# Altium PCB PCB3.PcbDoc
Units mm, origin at the board's own origin, x right, y up, seen from the top; angles counter-clockwise.
Board outline 40.08 x 40.08 mm, 2 copper layers (Top Layer, Bottom Layer); 33 components, 27 nets, 198 pads, 24 vias.
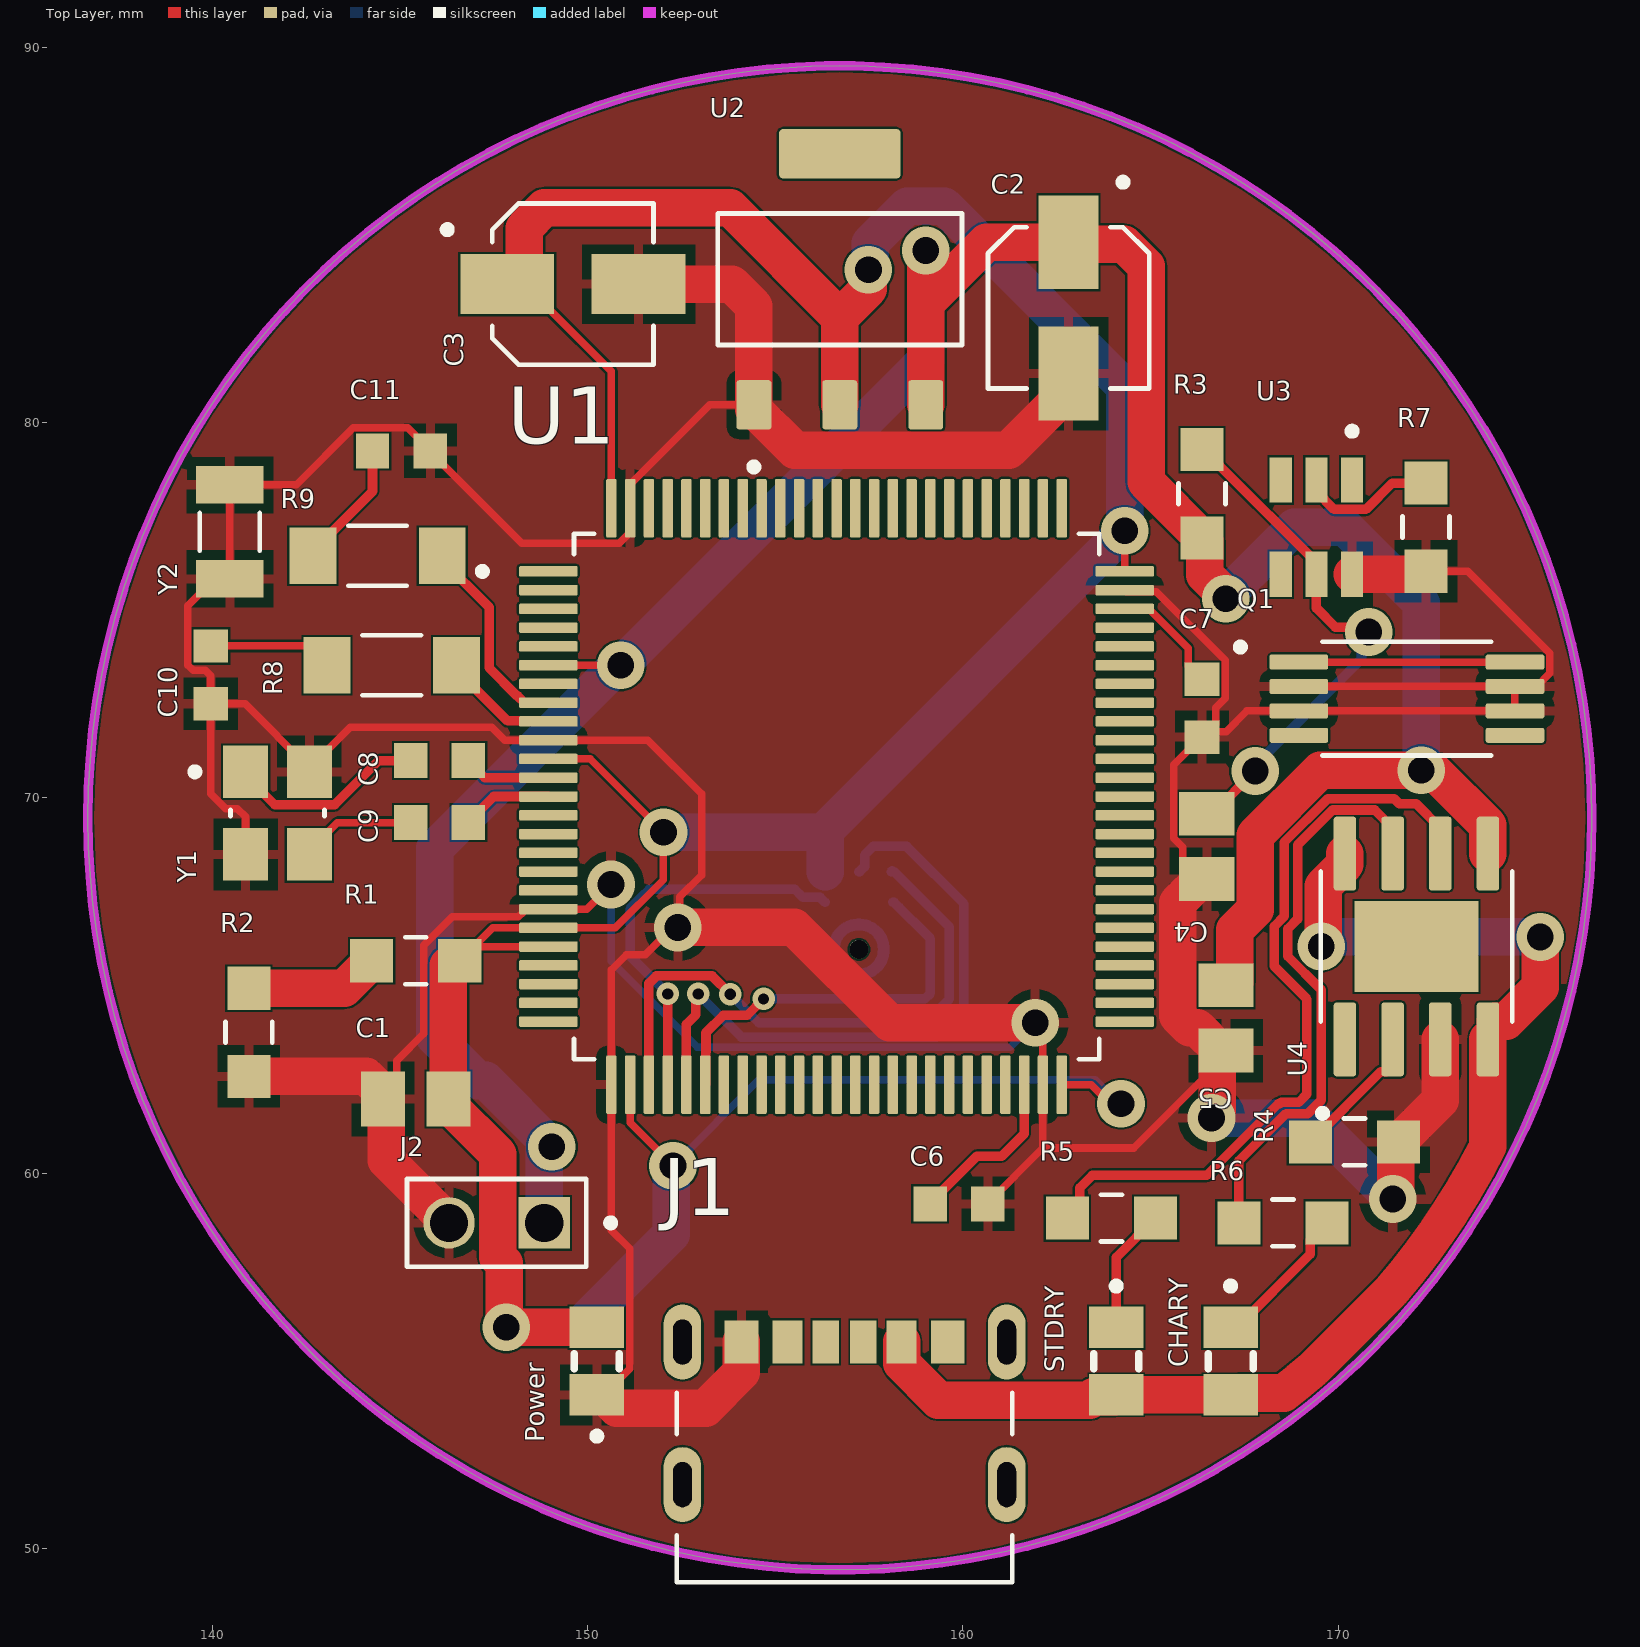
[diagram p0: Top Layer view]
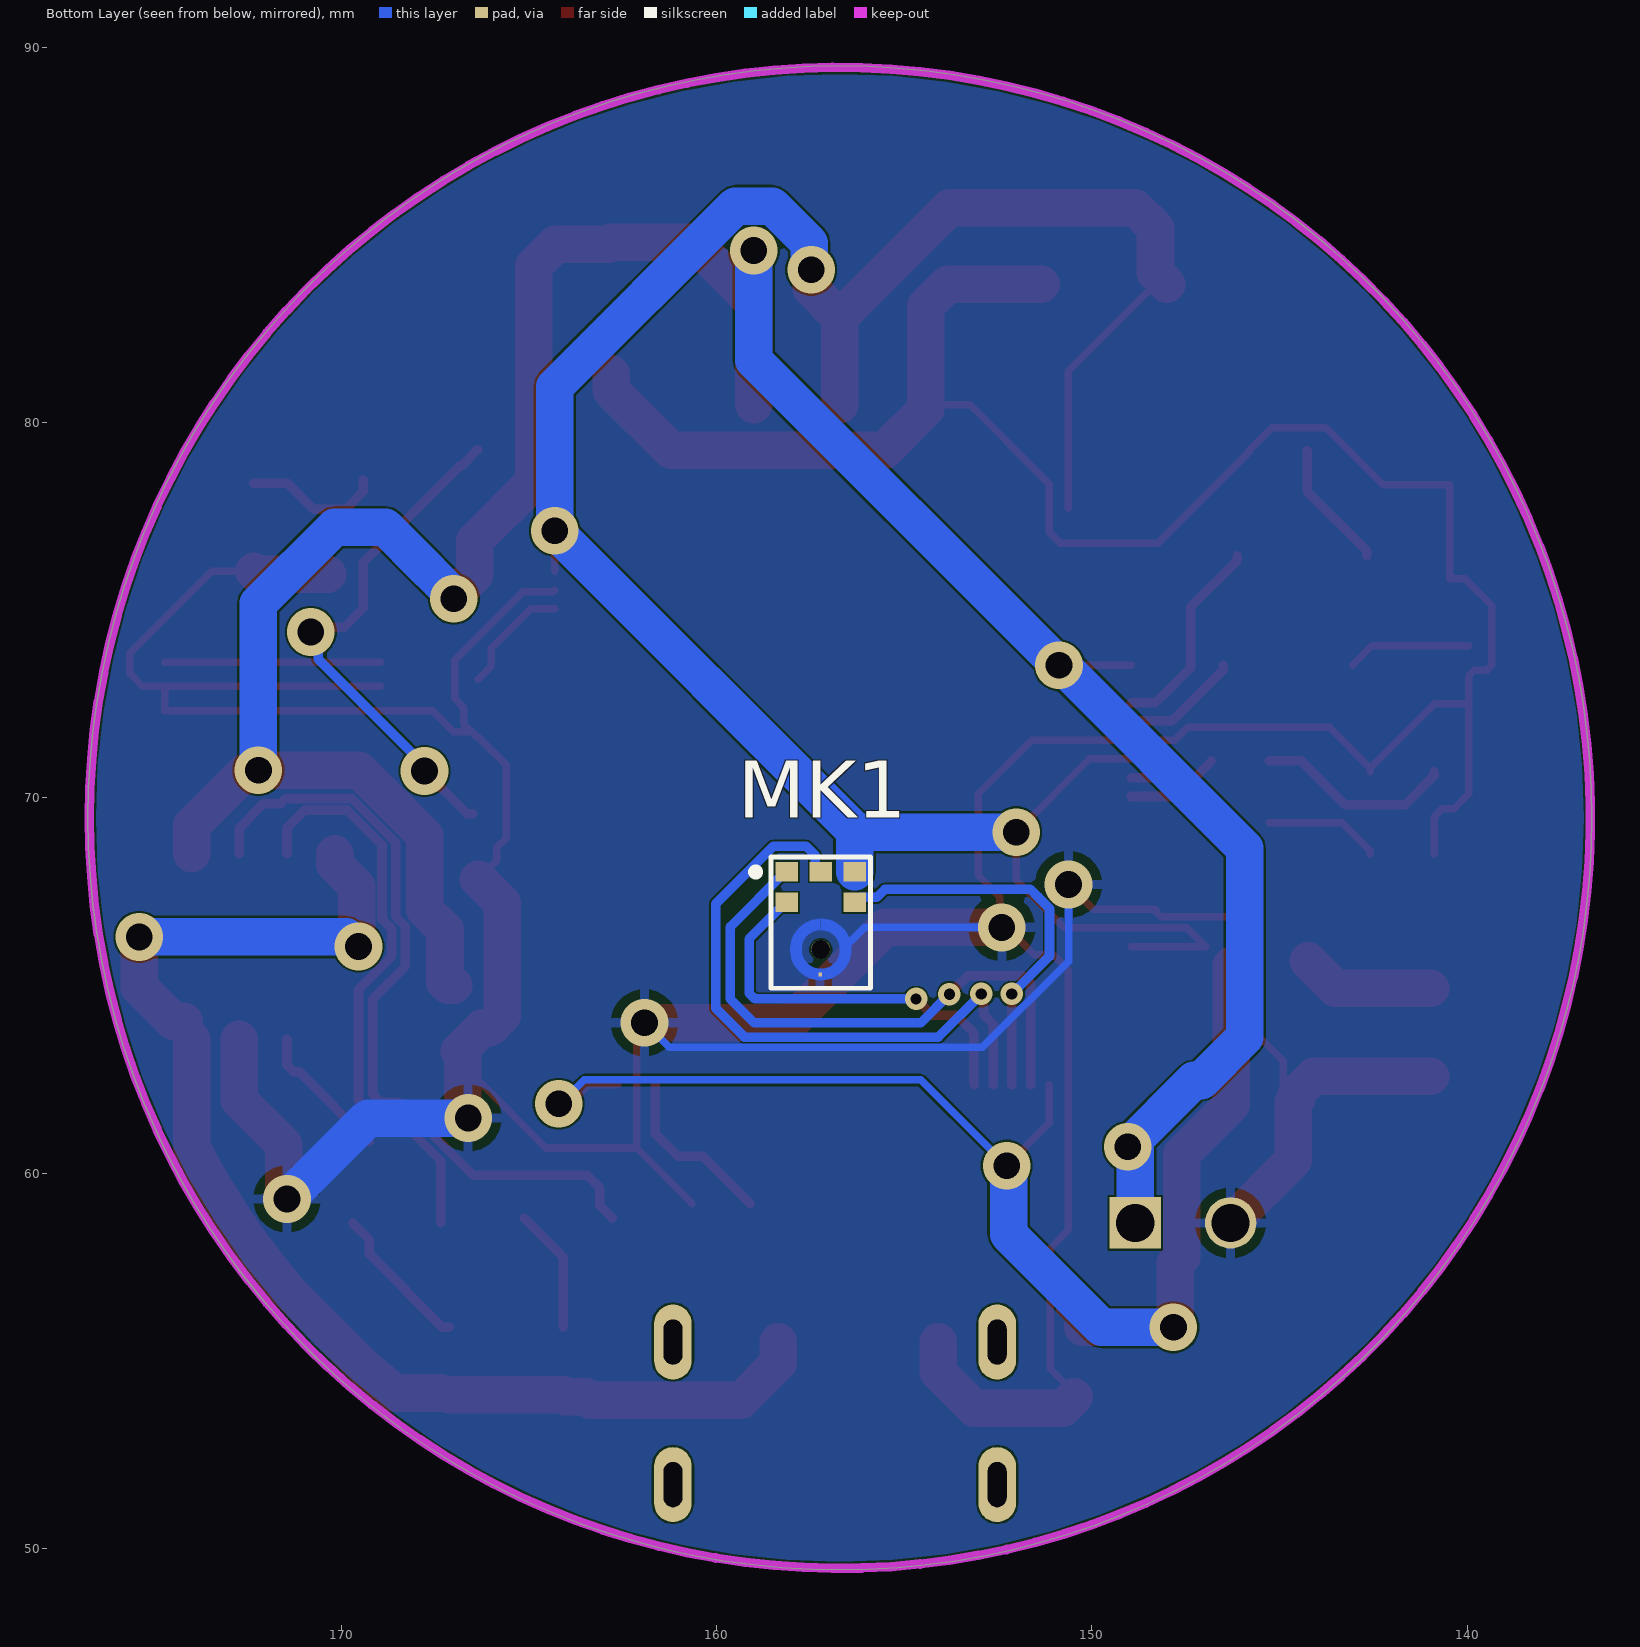
[diagram p1: Bottom Layer view, seen from below]
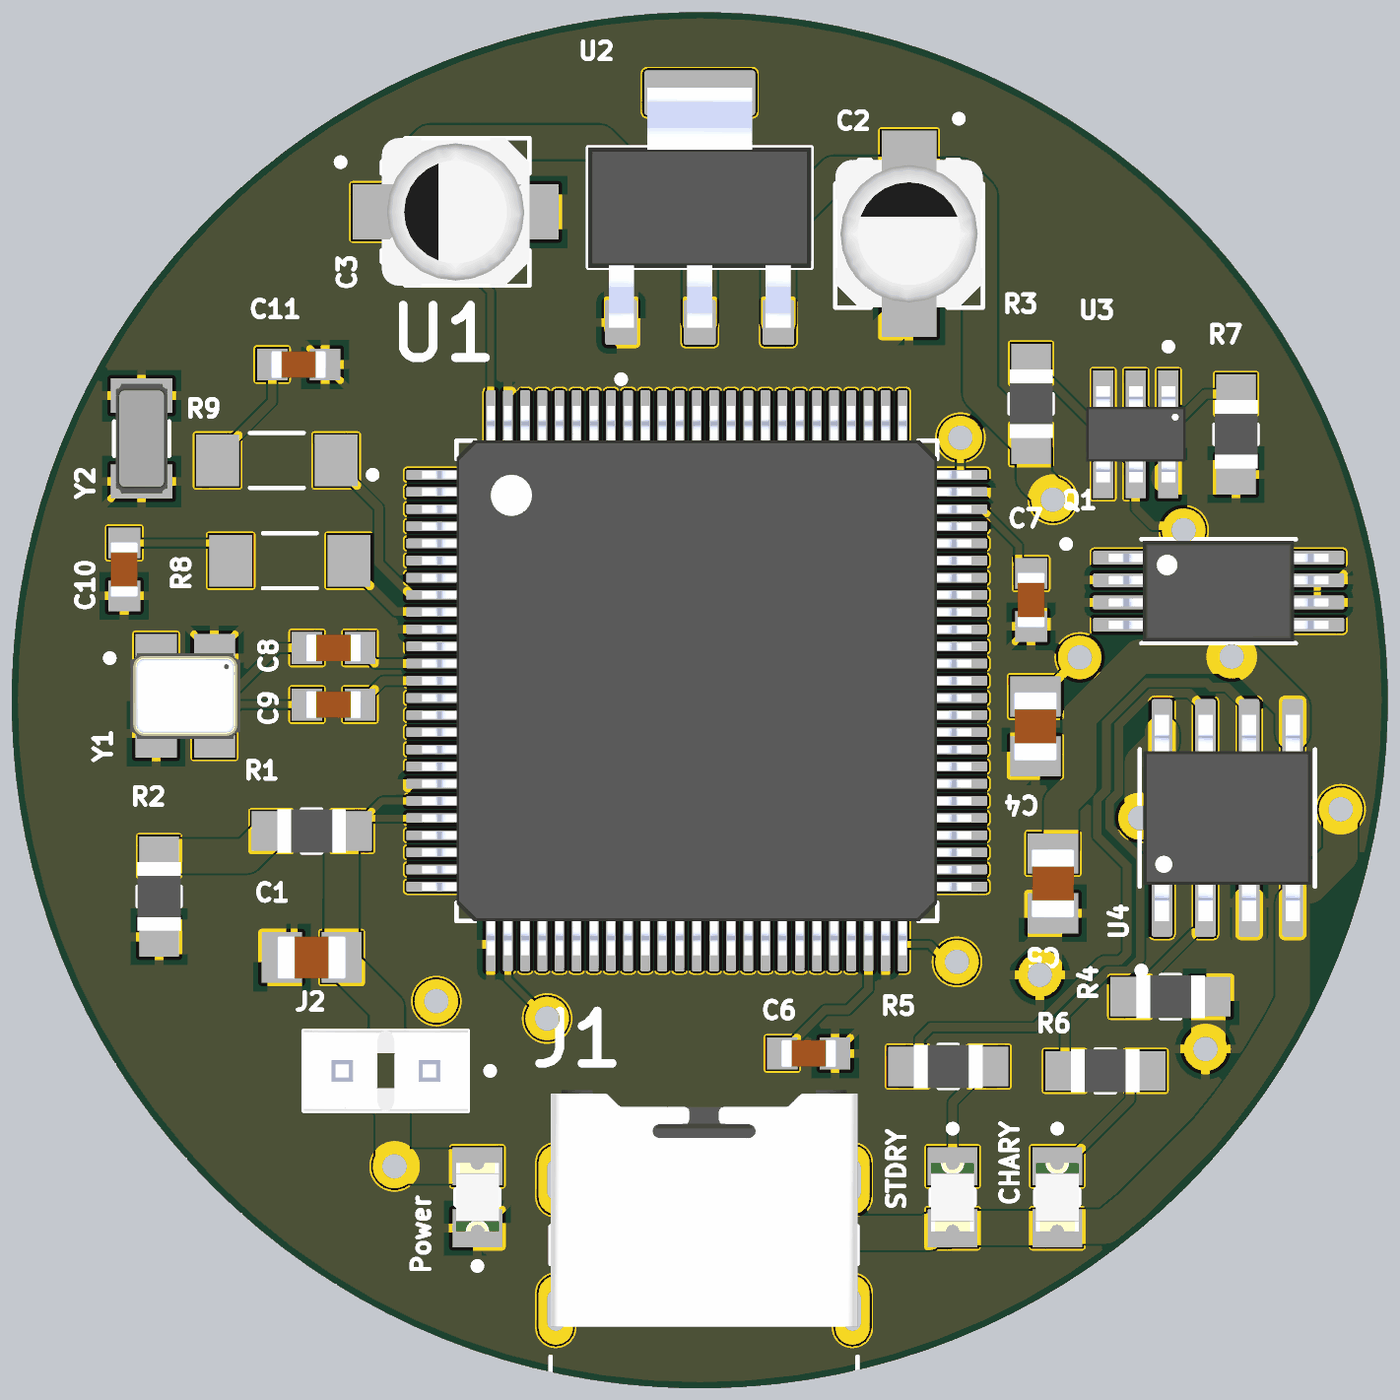
[diagram p2: 3D render of the assembled board from above, using the file's embedded part models]

## Layer stack, top to bottom
Top Solder: solder mask 0.0102, Solder Resist, Dk 3.5
Top Layer: signal copper 0.0356
Dielectric 1: dielectric 0.32, FR-4, Dk 4.8
Bottom Layer: signal copper 0.0356
Bottom Solder: solder mask 0.0102, Solder Resist, Dk 3.5

## Board outline
136.677,69.469 ccw(c156.718,69.469) 156.718,49.428 ccw(c156.718,69.469) 176.759,69.469 ccw(c156.718,69.469) 156.718,89.51 ccw(c156.718,69.469)

## Design rules (kind name [scope] priority, off if disabled: settings)
Clearance [All] p1: gap=0.051 ignorepadtopadclearanceinfootprint=TRUE
PolygonConnect [All] p1: connectstyle=Relief reliefconductorwidth=0.254 reliefentries=4 polygonreliefangle="90 Angle" airgapwidth=0.254
RoutingVias WS [InNet('WS')] p1: holewidth=0.6 width=1.2 viastyle="Through Hole" minholewidth=0.2 minwidth=0.5 maxholewidth=0.3 maxwidth=0.6
RoutingVias LR [InNet('LR')] p2: holewidth=0.6 width=1.2 viastyle="Through Hole" minholewidth=0.2 minwidth=0.5 maxholewidth=0.3 maxwidth=0.6
RoutingVias SDI [InNet('SDI')] p3: holewidth=0.6 width=1.2 viastyle="Through Hole" minholewidth=0.2 minwidth=0.5 maxholewidth=0.3 maxwidth=0.6
RoutingVias SCK [InNet('SCK')] p4: holewidth=0.6 width=1.2 viastyle="Through Hole" minholewidth=0.2 minwidth=0.5 maxholewidth=0.3 maxwidth=0.6
RoutingVias [All] p5: holewidth=0.711 width=1.27 viastyle="Through Hole" minholewidth=0.711 minwidth=1.27 maxholewidth=0.711 maxwidth=1.27
SolderMaskExpansion [All] p1: expansion=0.102 istentingtop=FALSE
SupplyNets "Schematic Supply Nets_3" [InNet('+3.3V')] p1: voltage=0.000
SupplyNets "Schematic Supply Nets_2" [InNet('VBUS')] p2: voltage=0.000
SupplyNets "Schematic Supply Nets_1" [InNet('GND')] p3: voltage=0.000
SupplyNets "Schematic Supply Nets" [InNet('BAT+')] p4: voltage=0.000
Width GND [InNet('GND')] p1: maxlimit=2 minlimit=0.2 preferedwidth=1
Width INPUT [InNet('INPUT')] p2: maxlimit=2 minlimit=0.2 preferedwidth=1
Width VBUS [InNet('VBUS')] p3: maxlimit=2 minlimit=0.2 preferedwidth=1
Width 3.3 [InNet('+3.3V')] p4: maxlimit=2 minlimit=0.2 preferedwidth=1
Width BAT [InNet('BAT+')] p5: maxlimit=2 minlimit=0.2 preferedwidth=1
Width [All] p6: maxlimit=0.3 minlimit=0.2 preferedwidth=0.254
30 further rules are at their usual default settings.

## Components (designator, comment, footprint, x,y, rotation, side; value= is the part's Value field where it differs from the comment)
C1 "104" CAPC2012X145N 145.415,61.976 r0 top
C2 "1μF 50V" CAP_EEEHP1H1R0R 162.814,83.058 r270 top
C3 "1μF 50V" CAP_EEEHP1H1R0R 149.606,83.693 r0 top
C4 "104" CAPC2012X145N 166.497,68.707 r90 top
C5 "106" CAPC2012X145N 167.005,64.135 r90 top
C6 "2.2uF" CAPC1608X90N 159.893,59.182 r180 top
C7 "2.2uF" CAPC1608X90N 166.37,72.39 r90 top
C8 "12.5pF" CAPC1608X90N 146.05,70.993 r0 top
C9 "12.5pF" CAPC1608X90N 146.05,69.342 r180 top
C10 "12.5pF" CAPC1608X90N 139.954,73.279 r90 top
C11 "12.5pF" CAPC1608X90N 145.034,79.248 r180 top
CHARY "597-5411-407F" LEDC2012X70N 167.132,54.991 r270 top (schematic designator D3)
J1 "UJC-HP-3-SMT-TR" CUI_UJC-HP-3-SMT-TR 156.845,55.499 r0 top
J2 "3-644456-2" TE_3-644456-2 148.844,58.674 r180 top
MK1 "ICS-43434" MIC_ICS-43434 157.226,66.675 r180 bottom
Power "597-5411-407F" LEDC2012X70N 150.241,54.991 r90 top (schematic designator D1)
Q1 "FS8205A" SOP65P640X120-8N 171.831,72.644 r0 top
R1 "1K" RES_ERJU06J203V 145.415,65.659 r0 top
R2 "1K" RES_ERJU06J203V 140.97,63.754 r270 top
R3 "1K" RES_ERJU06J203V 166.37,78.105 r270 top
R4 "1K" RES_ERJU06J203V 170.434,60.833 r180 top
R5 "1K" RES_ERJU06J203V 163.957,58.801 r0 top
R6 "1K" RES_ERJU06J203V 168.529,58.674 r0 top
R7 "1K" RES_ERJU06J203V 172.339,77.216 r270 top
R8 "0 0.1%" RES_ERJU08F2201V 144.78,73.533 r180 top
R9 "0 0.1%" RES_ERJU08F2201V 144.399,76.454 r180 top
STDRY "597-5411-407F" LEDC2012X70N 164.084,54.991 r270 top (schematic designator D2)
U1 "STM32H743VIT6" QFP50P1600X1600X160-100N 156.631,70.037 r0 top
U2 "AMS1117-3.3" SOT229P700X180-4N 156.718,83.82 r90 top
U3 "DW01A" SOT95P280X145-6N 169.418,77.216 r270 top
U4 "TP4056" SOP127P600X175-9N 172.085,66.04 r90 top
Y1 "24MHz" XTAL_C3E-24.000-12-3030-R 141.732,69.596 r0 top
Y2 "32.7680K" XTAL_FC-135_32.7680KA-A0 140.462,77.089 r90 top

## Footprints (in the part's own frame and the unit in brackets; to place one, negate y for a bottom-side part, rotate by r counter-clockwise, add the part's x,y. Pads: shape width x height; smd on the part's side, far side on the other; paste and mask are expansions set on the pad)
CAP_EEEHP1H1R0R [mm]
  rect 2.5x1.6 smd: 1(-1.75,0) 2(1.75,0)
  silkscreen extent -3.45,-2.15 2.15,2.15, body extent -2.5,-2.15 2.5,2.15, height 5.3
CAPC1608X90N [mm]
  rect 0.89x0.93 smd: 1(-0.77,0) 2(0.77,0)
  body extent -0.8,-0.4 0.8,0.4, height 0.9
CAPC2012X145N [mm]
  rect 1.17x1.47 smd: 1(-0.871,0) 2(0.871,0)
  body extent -1,-0.63 1,0.63, height 1.45
CUI_UJC-HP-3-SMT-TR [mm]
  rect 0.7x1.15 smd: A5(-0.5,0.005) B5(0.5,0.005)
  rect 0.8x1.15 smd: A9(1.52,0.005) B9(-1.52,0.005)
  rect 0.9x1.15 smd: A12(2.75,0.005) B12(-2.75,0.005)
  oval 1x2 hole 0.5 slot 1.2 at 90 deg: S1(-4.32,0) S2(4.32,0) S3(-4.32,-3.8) S4(4.32,-3.8)
  silkscreen extent -4.47,-6.4 4.47,-1.35, body extent -4.47,-4.28 4.47,2.62, height 1.93
LEDC2012X70N [mm]
  rect 1.1x1.45 smd: A(0.9,0) C(-0.9,0)
  silkscreen extent -2.1,-0.6 0.2,0.6, body extent -1,-0.63 1,0.63, height 0.7
MIC_ICS-43434 [mm]
  rect 0.6x0.522 smd paste-0.05: 1(-0.9,1.361) 2(-0.9,0.539) 4(0.9,0.539) 5(0.9,1.361) 6(0,1.361)
  rect 0.1x0.1 smd paste-1 mask+0: 3(-0.015,-1.383)
  round 0.5 hole 0.5 unplated mask+0.665: ""(0,-0.713)
  Top Layer region: 250 vertices and 0 holes, not listed, extent -0.81,-1.53 0.81,0.1
  silkscreen extent -1.84,-1.75 1.33,1.75, body extent -1.33,-1.75 1.33,1.75, height 0.98
QFP50P1600X1600X160-100N [mm]
  rrect25% 1.56x0.28 smd: 1(-7.68,6) 2(-7.68,5.5) 3(-7.68,5) 4(-7.68,4.5) 5(-7.68,4) 6(-7.68,3.5) 7(-7.68,3) 8(-7.68,2.5) 9(-7.68,2) 10(-7.68,1.5) 11(-7.68,1) 12(-7.68,0.5) 13(-7.68,0) 14(-7.68,-0.5) 15(-7.68,-1) 16(-7.68,-1.5) 17(-7.68,-2) 18(-7.68,-2.5) 19(-7.68,-3) 20(-7.68,-3.5) 21(-7.68,-4) 22(-7.68,-4.5) 23(-7.68,-5) 24(-7.68,-5.5) 25(-7.68,-6) 51(7.68,-6) 52(7.68,-5.5) 53(7.68,-5) 54(7.68,-4.5) 55(7.68,-4) 56(7.68,-3.5) 57(7.68,-3) 58(7.68,-2.5) 59(7.68,-2) 60(7.68,-1.5) 61(7.68,-1) 62(7.68,-0.5) 63(7.68,0) 64(7.68,0.5) 65(7.68,1) 66(7.68,1.5) 67(7.68,2) 68(7.68,2.5) 69(7.68,3) 70(7.68,3.5) 71(7.68,4) 72(7.68,4.5) 73(7.68,5) 74(7.68,5.5) 75(7.68,6)
  rrect25% 0.28x1.56 smd: 26(-6,-7.68) 27(-5.5,-7.68) 28(-5,-7.68) 29(-4.5,-7.68) 30(-4,-7.68) 31(-3.5,-7.68) 32(-3,-7.68) 33(-2.5,-7.68) 34(-2,-7.68) 35(-1.5,-7.68) 36(-1,-7.68) 37(-0.5,-7.68) 38(0,-7.68) 39(0.5,-7.68) 40(1,-7.68) 41(1.5,-7.68) 42(2,-7.68) 43(2.5,-7.68) 44(3,-7.68) 45(3.5,-7.68) 46(4,-7.68) 47(4.5,-7.68) 48(5,-7.68) 49(5.5,-7.68) 50(6,-7.68) 76(6,7.68) 77(5.5,7.68) 78(5,7.68) 79(4.5,7.68) 80(4,7.68) 81(3.5,7.68) 82(3,7.68) 83(2.5,7.68) 84(2,7.68) 85(1.5,7.68) 86(1,7.68) 87(0.5,7.68) 88(0,7.68) 89(-0.5,7.68) 90(-1,7.68) 91(-1.5,7.68) 92(-2,7.68) 93(-2.5,7.68) 94(-3,7.68) 95(-3.5,7.68) 96(-4,7.68) 97(-4.5,7.68) 98(-5,7.68) 99(-5.5,7.68) 100(-6,7.68)
  silkscreen extent -9.54,-7 7,7, body extent -8,-8 8,8, height 1.6
RES_ERJU06J203V [mm]
  rect 1.15x1.15 smd: 1(-1.175,0) 2(1.175,0)
  silkscreen extent -0.28,-0.62 0.28,0.62, body extent -1,-0.63 1,0.63, height 0.6
RES_ERJU08F2201V [mm]
  rect 1.25x1.5 smd: 1(-1.725,0) 2(1.725,0)
  silkscreen extent -0.78,-0.8 0.78,0.8
SOP65P640X120-8N [mm]
  rrect25% 1.56x0.4 smd: 1(-2.88,0.975) 2(-2.88,0.325) 3(-2.88,-0.325) 4(-2.88,-0.975) 5(2.88,-0.975) 6(2.88,-0.325) 7(2.88,0.325) 8(2.88,0.975)
  silkscreen extent -4.54,-1.52 2.25,1.52, body extent -3.2,-1.47 3.2,1.47, height 1.2
SOP127P600X175-9N [mm]
  rrect25% 1.97x0.6 smd: 1(-2.475,1.905) 2(-2.475,0.635) 3(-2.475,-0.635) 4(-2.475,-1.905) 5(2.475,-1.905) 6(2.475,-0.635) 7(2.475,0.635) 8(2.475,1.905)
  rect 2.413x3.302 smd paste-3: 9(0,0)
  silkscreen extent -4.54,-2.55 2,2.6, body extent -3,-2.45 3,2.45, height 1.75
SOT95P280X145-6N [mm]
  rect 1.21x0.59 smd: 1(-1.255,0.95) 2(-1.255,0) 3(-1.255,-0.95) 4(1.255,-0.95) 5(1.255,0) 6(1.255,0.95)
  silkscreen extent -2.65,0.85 -2.46,1.05, body extent -1.4,-1.45 1.4,1.45, height 1.45
SOT229P700X180-4N [mm]
  rrect15% 1.31x0.93 smd: 1(-3.345,2.29) 2(-3.345,0) 3(-3.345,-2.29)
  rrect15% 1.31x3.24 smd: 4(3.345,0)
  silkscreen extent -5.1,-3.25 1.75,3.25, body extent -3.5,-3.25 3.5,3.25, height 1.8
TE_3-644456-2 [mm]
  rect 1.37x1.37 / inner round 1.37 / far side rect 1.37x1.37 hole 1.02: 1(0,0)
  round 1.37 hole 1.02: 2(2.54,0)
  silkscreen extent -1.87,-1.17 3.66,1.17, body extent -1.12,-1.17 3.66,1.17, height 10.03
XTAL_C3E-24.000-12-3030-R [mm]
  rect 1.2x1.4 smd: 1(-0.85,1.1) 2(-0.85,-1.1) 3(0.85,-1.1) 4(0.85,1.1)
  silkscreen extent -2.3,-0.08 1.25,1.2, body extent -1.25,-1.6 1.25,1.6, height 0.75
XTAL_FC-135_32.7680KA-A0 [mm]
  rect 1x1.8 smd: 1(-1.25,0) 2(1.25,0)
  silkscreen extent -0.5,-0.8 0.5,0.8, body extent -1.6,-0.75 1.6,0.75, height 0.9

## Part data
C1 C4 C5: library part VJ0805A220KXCAP, "22 pF Â±10% 200V Ceramic Capacitor C0G, NP0 0805 (2012 Metric)", Package="2012 Vishay Vitramon", Check_prices=https://www.snapeda.com/parts/VJ0805A220KXCAP/Vishay/view-part/?ref=eda, MF="Vishay Vitramon", MP=VJ0805A220KXCAP, SnapEDA_Link=https://www.snapeda.com/parts/VJ0805A220KXCAP/Vishay/view-part/?ref=snap
C2 C3: library part EEEHP1H1R0R, "1ÂµF 50V Aluminum Electrolytic Capacitors Radial, Can - SMD 2000 Hrs @ 105Â°C", Package="RADIAL-2 Panasonic", Availability="In Stock", Check_prices=https://www.snapeda.com/parts/EEEHP1H1R0R/Panasonic/view-part/?ref=eda, MF=Panasonic, MP=EEEHP1H1R0R, Price=None, Purchase-URL=https://pricing.snapeda.com/search/part/EEEHP1H1R0R/?ref=eda, SnapEDA_Link=https://www.snapeda.com/parts/EEEHP1H1R0R/Panasonic/view-part/?ref=snap
C6 C7 C8 C9 C10 C11: library part CL10B104KB8NNNC, "0.1 ÂµF Â±10% 50V Ceramic Capacitor X7R 0603 (1608 Metric)", Package="1608-2 SAMSUNG", Check_prices=https://www.snapeda.com/parts/CL10B104KB8NNNC/Samsung/view-part/?ref=eda, MF="Samsung Electro-Mechanics", MP=CL10B104KB8NNNC, SnapEDA_Link=https://www.snapeda.com/parts/CL10B104KB8NNNC/Samsung/view-part/?ref=snap
CHARY Power STDRY: "SMD LED 0805 YG 7", Package="0805 Dialight", Check_prices=https://www.snapeda.com/parts/597-5411-407F/Dialight/view-part/?ref=eda, MF=Dialight, MP=597-5411-407F, SnapEDA_Link=https://www.snapeda.com/parts/597-5411-407F/Dialight/view-part/?ref=snap
J1: Package=None, Availability=Unavailable, MP=UJC-HP-3-SMT-TR, Price=None
J2: "HEADER ASSEMBLY, NARROW, MTA-100, 2 POSITION, STRAIGHT", Package=None, Check_prices=https://www.snapeda.com/parts/3-644456-2/TE+Connectivity+AMP+Connectors/view-part/?ref=eda, MF="TE Connectivity", MP=3-644456-2, SnapEDA_Link=https://www.snapeda.com/parts/3-644456-2/TE+Connectivity+AMP+Connectors/view-part/?ref=snap
MK1: "60 Hz ~ 20 kHz Digital, IÂ²S Microphone MEMS (Silicon) 1.65 V ~ 3.63 V Omnidirectional (-26 Â±1dB @ 94dB SPL) Solder Pads", Package="Custom Package TDK InvenSense", Availability="In Stock", Check_prices=https://www.snapeda.com/parts/ICS-43434/TDK+InvenSense/view-part/?ref=eda, MF="TDK InvenSense", MP=ICS-43434, Price=None, Purchase-URL=https://pricing.snapeda.com/search/part/ICS-43434/?ref=eda, SnapEDA_Link=https://www.snapeda.com/parts/ICS-43434/TDK+InvenSense/view-part/?ref=snap
Q1: Package=Package, Check_prices=https://www.snapeda.com/parts/FS8205A/Fortune+Semiconductor/view-part/?ref=eda, MF="Fortune Semiconductor", MP=FS8205A, SnapEDA_Link=https://www.snapeda.com/parts/FS8205A/Fortune+Semiconductor/view-part/?ref=snap
R1 R2 R3 R4 R5 R6 R7: library part R0805, "R0805", Package=None, Availability=Unavailable, MP=ERJU06J203V, Price=None
R8 R9: library part ERJU08F2201V, "0Ohm 0.1%", Package=None, Availability=Unavailable, MP=ERJU08F2201V, Price=None
U1: "ARMÂ® CortexÂ®-M7 STM32H7 Microcontroller IC 32-Bit Single-Core 480MHz 2MB (2M x 8) FLASH 100-LQFP (14x14)", Package="LQFP-100 STMicroelectronics", Check_prices=https://www.snapeda.com/parts/STM32H743VIT6/STMicroelectronics/view-part/?ref=eda, MF=STMicroelectronics, MP=STM32H743VIT6, SnapEDA_Link=https://www.snapeda.com/parts/STM32H743VIT6/STMicroelectronics/view-part/?ref=snap
U2: "Sot223/Pkg 1-Amp 3.3-Volt Low Drop Out Voltage Regulatator", Package="SOT-223 Seeed Technology", Check_prices=https://www.snapeda.com/parts/AMS1117-3.3/Advanced+Monolithic+Systems/view-part/?ref=eda, MF="Advanced Monolithic Systems", MP=AMS1117-3.3, SnapEDA_Link=https://www.snapeda.com/parts/AMS1117-3.3/Advanced+Monolithic+Systems/view-part/?ref=snap
U3: "One Cell Lithium-ion/Polymer Battery Protection IC", Package="SOT-23-6 Fortune Semiconductor", Check_prices=https://www.snapeda.com/parts/DW01A/Fortune+Semiconductor/view-part/?ref=eda, MF="Fortune Semiconductor", MP=DW01A, SnapEDA_Link=https://www.snapeda.com/parts/DW01A/Fortune+Semiconductor/view-part/?ref=snap
U4: "Complete single cell Li-Ion battery with a constant current / constant voltage linear charger", Package=Package, Availability="Not in stock", Check_prices=https://www.snapeda.com/parts/TP4056/NanJing+Top+Power+ASIC+Corp./view-part/?ref=eda, MF="NanJing Top Power ASIC Corp.", MP=TP4056, Price=None, SnapEDA_Link=https://www.snapeda.com/parts/TP4056/NanJing+Top+Power+ASIC+Corp./view-part/?ref=snap
Y1: library part C3E-24.000-12-3030-R, Package=None, Availability=Unavailable, MP=C3E-24.000-12-3030-R, Price=None
Y2: library part FC-135_32.7680KA-A0, "32.768 kHz Â±20ppm Crystal 12.5pF 70 kOhms 2-SMD, No Lead", Package="SMD-2 Epson", Check_prices=https://www.snapeda.com/parts/FC-135%2032.7680KA-A0/EPSON/view-part/?ref=eda, MF=EPSON, MP="FC-135 32.7680KA-A0", SnapEDA_Link=https://www.snapeda.com/parts/FC-135%2032.7680KA-A0/EPSON/view-part/?ref=snap

## Via types
v1: diameter 1.27, hole 0.711, Top Layer to Bottom Layer, 20 vias
v2: diameter 0.6, hole 0.3, Top Layer to Bottom Layer, 4 vias

## Nets (pads, with @x,y where several pads share a name; then routed paths per layer and width w, separated by ;. In a path a pad name is that pad's centre, name@x,y a point inside that pad or via, vN(x,y) a via of type N, cw(c..) or ccw(c..) an arc to the next point about the centre after c; other vN are vias at no path point)
+3.3V: C1.2 C3.1 MK1.5 Power.A R1.2 U1.11 U1.20 U1.21 U1.27 U1.50 U1.75 U1.100 U2.2 | length 105.6
  Top Layer w0.2: C3.1 148.306,83.693 150.631,81.368 U1.100 ; U1.21 146.968,66.037 147.468,66.537 U1.20 150.738,66.537 152.019,67.818 v1(152.019,69.088) 150.07,71.037 U1.11 ; Power.A 150.416,55.891 Power.A@150.866,56.341 ; U1.27 151.131,61.34 v1(152.273,60.198) ; U1.50 163.413,62.357 163.921,61.849 v1(164.211,61.849) ; U1.75 v1(164.311,77.116)
  Top Layer w1: R1.2@146.286,65.542 C1.2 146.286,61.826 147.608,60.504 147.608,57.761 147.776,57.593 147.776,55.943 v1(147.828,55.891) Power.A ; C3.1@148.005,83.693 148.305,83.993 148.305,85.186 148.844,85.725 153.797,85.725 156.718,82.804 ; U2.2 156.718,82.804 ; v1(157.48,84.074) 157.48,83.566 156.718,82.804
  Bottom Layer w0.2: v1(152.273,60.198) 154.559,62.484 163.524,62.484 164.159,61.849 v1(164.211,61.849)
  Bottom Layer w1: v1(147.828,55.891) 149.744,55.891 152.221,58.368 152.221,60.146 v1(152.273,60.198) ; v1(152.019,69.088) 156.283,69.088 156.326,69.131 ; MK1.5 156.326,69.131 ; v1(157.48,84.074) 157.532,84.126 157.532,84.787 158.517,85.772 159.499,85.772 164.311,80.96 v1(164.311,77.116) 156.326,69.131
BAT+: C2.1 C5.2 J2.1 R3.2 U1.6 U2.3 U4.5 | length 79.4
  Top Layer w0.2: U1.6 150.872,73.537 v1(150.876,73.533)
  Top Layer w1: U2.3 159.008,83.189 ; v1(159.008,84.586) 159.008,83.189 ; C5.2 167.155,65.006 167.24,65.091 167.24,66.48 167.783,67.023 167.783,69 169.522,70.739 v1(172.212,70.739) 172.264,70.687 172.568,70.687 173.99,69.265 U4.5 ; v1(167.005,75.311) 167.005,75.384 166.445,75.944 166.445,76.855 164.881,78.419 164.881,84.166 164.295,84.752 162.87,84.752 C2.1 160.627,84.808 159.008,83.189
  Bottom Layer w1: J2.1 v1@148.844,60.706 ; v1(149.045,60.706) 147.282,62.469 147.081,62.469 145.923,63.627 145.923,68.653 150.803,73.533 v1(150.876,73.533) 159.008,81.665 v1(159.008,84.586) ; v1(167.005,75.311) 167.005,75.384 168.241,76.62 168.241,76.63 168.826,77.216 170.18,77.216 172.212,75.184 v1(172.212,70.739)
CHRG: R6.1 U4.7 | length 15.6
  Top Layer w0.254: R6.1 167.354,60.329 168.61,61.586 169.19,61.586 169.545,61.941 169.545,64.891 168.656,65.78 168.656,66.506 168.919,66.769 168.919,68.746 169.85,69.678 170.972,69.678 171.45,69.2 U4.7
GND: C1.1 C2.2 C3.2 C4.1 C5.1 C6.1 C7.1 C10.1 C11.1 J1.B12 J2.2 MK1.3 Power.C Q1.2 Q1.3 Q1.6 Q1.7 R2.2 R4.1 R7.2 U1.10 U1.19 U1.26 U1.49 U1.74 U1.99 U2.1 U3.6 U4.3 Y1.2 Y1.4 Y2.1 Y2.2 | length 192.7
  Top Layer w0.2: Y1.2 140.882,69.496 140.663,69.715 140.35,69.715 139.954,70.111 C10.1 ; Y1.4 Y1.4@142.582,70.796 ; C1.1 144.907,62.339 144.907,62.993 145.635,63.721 145.635,66.067 146.396,66.828 148.154,66.828 148.271,66.945 148.271,66.997 148.311,67.037 U1.19 149.968,67.037 v1(150.622,67.691) ; J2.2 J2.2@146.404,58.774 ; Power.C@150.466,54.041 150.466,54.141 151.117,54.792 151.117,57.991 150.631,58.477 U1.26 150.631,65.414 151.033,65.816 151.537,65.816 152.268,66.548 v1(152.4,66.548) 152.456,66.604 152.456,67.366 153.035,67.945 153.035,70.104 151.602,71.537 U1.10 147.792,71.537 147.447,71.882 143.668,71.882 Y1.4@142.582,70.796 ; U2.1 153.249,80.475 151.131,78.357 U1.99 151.131,77.077 150.84,76.786 148.246,76.786 145.804,79.228 C11.1 145.804,79.268 145.208,79.864 143.757,79.864 142.232,78.339 Y2.2 Y2.1 140.062,75.839 139.338,75.115 139.338,73.542 139.482,73.398 139.81,73.398 139.954,73.254 C10.1 ; C6.1 160.663,59.202 162.131,60.67 ; v1(161.925,64.008) 162.131,63.802 U1.49 162.131,60.67 ; U1.74 164.351,75.497 165.156,75.497 166.986,73.667 166.986,72.653 166.735,72.402 166.735,71.965 166.39,71.62 C7.1 ; 166.37,62.484 164.556,60.67 162.131,60.67 ; C4.1 166.347,67.836 165.862,68.321 165.862,68.68 165.611,68.931 165.611,70.881 166.35,71.62 C7.1 ; Q1.2 Q1.7 ; R7.2 173.453,76.041 175.642,73.852 175.642,73.32 175.291,72.969 Q1.7 ; C10.1 140.869,72.509 Y1.4@142.582,70.796 ; C7.1 166.518,71.768 167.018,71.768 167.569,72.319 Q1.3 Q1.6 Q1.7
  Top Layer w1: R2.2 144.091,62.579 144.544,62.126 C1.1 144.629,61.891 144.629,60.349 J2.2 ; Power.C@150.466,54.041 150.77,53.737 153.139,53.737 154.095,54.693 J1.B12 ; C3.2 153.842,83.693 154.428,83.107 U2.1 ; v1(152.4,66.548) 155.508,66.548 158.048,64.008 v1(161.925,64.008) ; U2.1@154.428,80.355 155.514,79.269 161.225,79.269 162.814,80.858 C2.2 ; C4.1@166.347,67.836 165.719,67.208 165.719,64.193 166.042,63.87 166.249,63.87 166.855,63.264 166.77,63.179 166.77,61.687 166.624,61.541 v1(166.624,61.468) ; U3.6 172.259,75.961 R7.2 ; v1(171.45,59.309) 171.45,59.382 171.534,59.466 171.534,60.758 R4.1 172.72,61.944 U4.3
  Bottom Layer w0.2: v1(150.622,67.691) 150.622,65.652 152.925,63.349 161.262,63.349 161.92,64.008 v1(161.925,64.008) ; v1(152.4,66.548) 156.052,66.548 156.423,66.177
  Bottom Layer w1: v1(166.624,61.468) 169.291,61.468 v1(171.45,59.309)
INPUT: CHARY.A J1.A9 STDRY.A U4.4 U4.8 | length 34.3
  Top Layer w1: J1.A9 158.365,54.93 159.347,53.948 163.373,53.948 163.466,54.041 164.034,54.041 STDRY.A CHARY.A 167.357,54.141 168.549,54.141 ccw(c156.718,69.469) 169.336,54.782 171.405,56.851 ccw(c156.718,69.469) 173.99,60.717 U4.4 ; v1(169.545,66.04) 169.597,66.092 169.597,67.647 170.18,68.23 U4.8 ; U4.4@174.19,64.05 174.475,64.05 175.384,64.959 v1@175.384,66.291
  Bottom Layer w1: v1(169.545,66.04) 169.618,66.04 169.872,66.294 v1(175.387,66.294)
LR: MK1.2 U1.31 | length 10.9
  Top Layer w0.254: U1.31 153.144,62.37 153.144,63.228 153.151,63.235 153.151,63.743 153.616,64.208 154.251,64.208 v2(154.686,64.643)
  Bottom Layer w0.254: v2(154.686,64.643) 158.982,64.643 159.131,64.792 159.131,66.248 MK1.2@158.165,67.214 ; MK1.2 MK1.2@158.165,67.214 ; MK1.2@158.299,67.08 MK1.2@158.165,67.214
NetC4_2: C4.2 R3.1 U3.5 | length 14
  Top Layer w0.254: R3.1 166.818,78.832 166.857,78.832 169.418,76.271 169.418,75.057 169.926,74.549 170.346,74.549 170.519,74.375 170.519,74.337 170.73,74.337 v1(170.815,74.422) ; C4.2 166.647,69.578 v1(167.785,70.716)
  Bottom Layer w0.254: v1(167.785,70.716) 167.785,70.866 170.621,73.702 170.621,74.228 v1(170.815,74.422)
NetC8_1: C8.1 Y1.1 | length 5.3
  Top Layer w0.254: Y1.1 140.882,70.596 141.66,69.818 143.256,69.818 144.43,70.993 C8.1
NetC9_2: C9.2 Y1.3 | length 3.1
  Top Layer w0.2: Y1.3 142.582,68.596 143.328,69.342 C9.2
NetC10_2: C10.2 R8.2 | length 3.3
  Top Layer w0.2: C10.2 142.539,74.049 R8.2
NetC11_2: C11.2 R9.2 | length 3.5
  Top Layer w0.254: R9.2 142.674,76.579 144.264,78.169 C11.2
NetD2_C: R5.2 STDRY.C | length 3.3
  Top Layer w0.254: STDRY.C 164.084,57.753 R5.2
NetD3_C: CHARY.C R6.2 | length 4
  Top Layer w0.254: CHARY.C 167.307,55.891 169.256,57.84 169.256,58.226 R6.2
NetQ1_1: Q1.1 Q1.8 | length 5.8
  Top Layer w0.2: Q1.1 Q1.8
NetR4_2: R4.2 U4.2 | length 3.7
  Top Layer w0.254: R4.2 171.133,62.707 171.277,62.707 171.45,62.88 U4.2
NetR7_1: R7.1 U3.2 | length 3.7
  Top Layer w0.254: U3.2 169.418,78.161 169.891,77.688 170.737,77.688 171.439,78.391 R7.1
PC15-OSC32-IN: R9.1 U1.8 | length 5.5
  Top Layer w0.254: R9.1 146.124,76.329 147.37,75.083 147.37,73.467 148.118,72.719 148.129,72.719 148.311,72.537 U1.8
PC15-OSC32-OUT: R8.1 U1.9 | length 3.1
  Top Layer w0.254: R8.1 146.505,73.408 147.863,72.05 148.938,72.05 U1.9
PH0-OSC-IN: C8.2 U1.12 | length 2.3
  Top Layer w0.254: C8.2 146.82,70.973 147.256,70.537 U1.12
PH1-OSC_OUT: C9.1 U1.13 | length 2.4
  Top Layer w0.254: C9.1 146.82,69.362 147.495,70.037 U1.13
SCK: MK1.4 U1.29 | length 10.7
  Top Layer w0.254: U1.29 152.133,62.359 152.133,64.775 v2(152.135,64.777)
  Bottom Layer w0.254: v2(152.135,64.777) 151.13,65.782 151.13,67.05 151.435,67.354 151.435,67.361 151.638,67.564 155.518,67.564 155.734,67.348 156.192,67.348 MK1.4
SDI: MK1.6 U1.30 | length 17.1
  Top Layer w0.254: U1.30 152.631,63.969 152.88,64.217 152.88,64.711 v2(152.946,64.777)
  Bottom Layer w0.254: v2(152.946,64.777) 154.096,63.627 159.258,63.627 160.02,64.389 160.02,67.183 158.496,68.707 157.607,68.707 157.377,68.477 157.377,68.17 157.243,68.036 MK1.6
STDBY: R5.1 U4.6 | length 20.9
  Top Layer w0.254: R5.1 163.113,59.132 163.113,59.608 163.449,59.944 166.497,59.944 168.402,61.849 168.443,61.849 168.484,61.891 168.952,61.891 169.167,62.106 169.167,64.64 168.299,65.508 168.299,65.919 168.297,65.92 168.297,66.579 168.558,66.84 168.558,68.817 169.724,69.983 171.486,69.983 171.621,69.848 172.072,69.848 172.72,69.2 U4.6
VBUS: R1.1 R2.1 | length 4.3
  Top Layer w0.2: R1.1@143.732,65.151 R1.1
  Top Layer w1: R2.1 143.51,64.929 R1.1
VCAP1: C6.2 U1.48 | length 4.6
  Top Layer w0.254: C6.2 159.123,59.202 160.373,60.452 161.036,60.452 161.631,61.047 U1.48
VCAP2: C7.2 U1.73 | length 3.1
  Top Layer w0.2: U1.73 164.951,75.037 166.005,73.983 166.005,73.505 166.35,73.16 C7.2
WS: MK1.1 U1.28 | length 15.7
  Top Layer w0.254: U1.28 151.631,65.058 151.828,65.255 153.312,65.255 v2(153.797,64.77)
  Bottom Layer w0.254: v2(153.797,64.77) 154.559,64.008 159.004,64.008 159.639,64.643 159.639,66.562 158.165,68.036 MK1.1@158.087,68.036 ; MK1.1@158.115,68.064 MK1.1@158.087,68.036 ; MK1.1 MK1.1@158.087,68.036
pads on no net: J1.A5 J1.A12 J1.B5 J1.B9 J1.S1 J1.S2 J1.S3 J1.S4 MK1. Q1.4 Q1.5 U1.1 U1.2 U1.3 U1.4 U1.5 U1.7 U1.14 U1.15 U1.16 U1.17 U1.18 U1.22 U1.23 U1.24 U1.25 U1.32 U1.33 U1.34 U1.35 U1.36 U1.37 U1.38 U1.39 U1.40 U1.41 U1.42 U1.43 U1.44 U1.45 U1.46 U1.47 U1.51 U1.52 U1.53 U1.54 U1.55 U1.56 U1.57 U1.58 U1.59 U1.60 U1.61 U1.62 U1.63 U1.64 U1.65 U1.66 U1.67 U1.68 U1.69 U1.70 U1.71 U1.72 U1.76 U1.77 U1.78 U1.79 U1.80 U1.81 U1.82 U1.83 U1.84 U1.85 U1.86 U1.87 U1.88 U1.89 U1.90 U1.91 U1.92 U1.93 U1.94 U1.95 U1.96 U1.97 U1.98 U2.4 U3.1 U3.3 U3.4 U4.1 U4.9

## Polygon pours and split planes (outlines as drawn)
GND on Top Layer "GND_L01_P000" (solid, remove dead copper, pour order 0): 132.334,91.059 132.334,52.705 139.065,45.974 139.827,46.736 178.689,46.736 178.689,66.548 182.88,70.739 177.292,76.327 177.292,90.805
GND on Bottom Layer "GND_L02_P003" (solid, remove dead copper, pour order 3): 130.556,94.361 130.556,48.006 140.843,37.719 146.558,43.434 187.198,43.434 187.198,94.107 185.039,96.266

## Keep-outs
Top Layer:
  circle w0.254: c156.718,69.469 r20.041
Bottom Layer:
  circle w0.254: c156.718,69.469 r20